# Altium PCB EVB_gate driver.PcbDoc
Units mm, origin at the board's own origin, x right, y up, seen from the top; angles counter-clockwise.
Board outline 29.97 x 33.27 mm, 2 copper layers (TOP Assembly Layer, Bottom Layer), stack 0.142 mm thick; 26 components, 19 nets, 81 pads, 0 vias.
Unrouted connection lines stored in the file: 62.
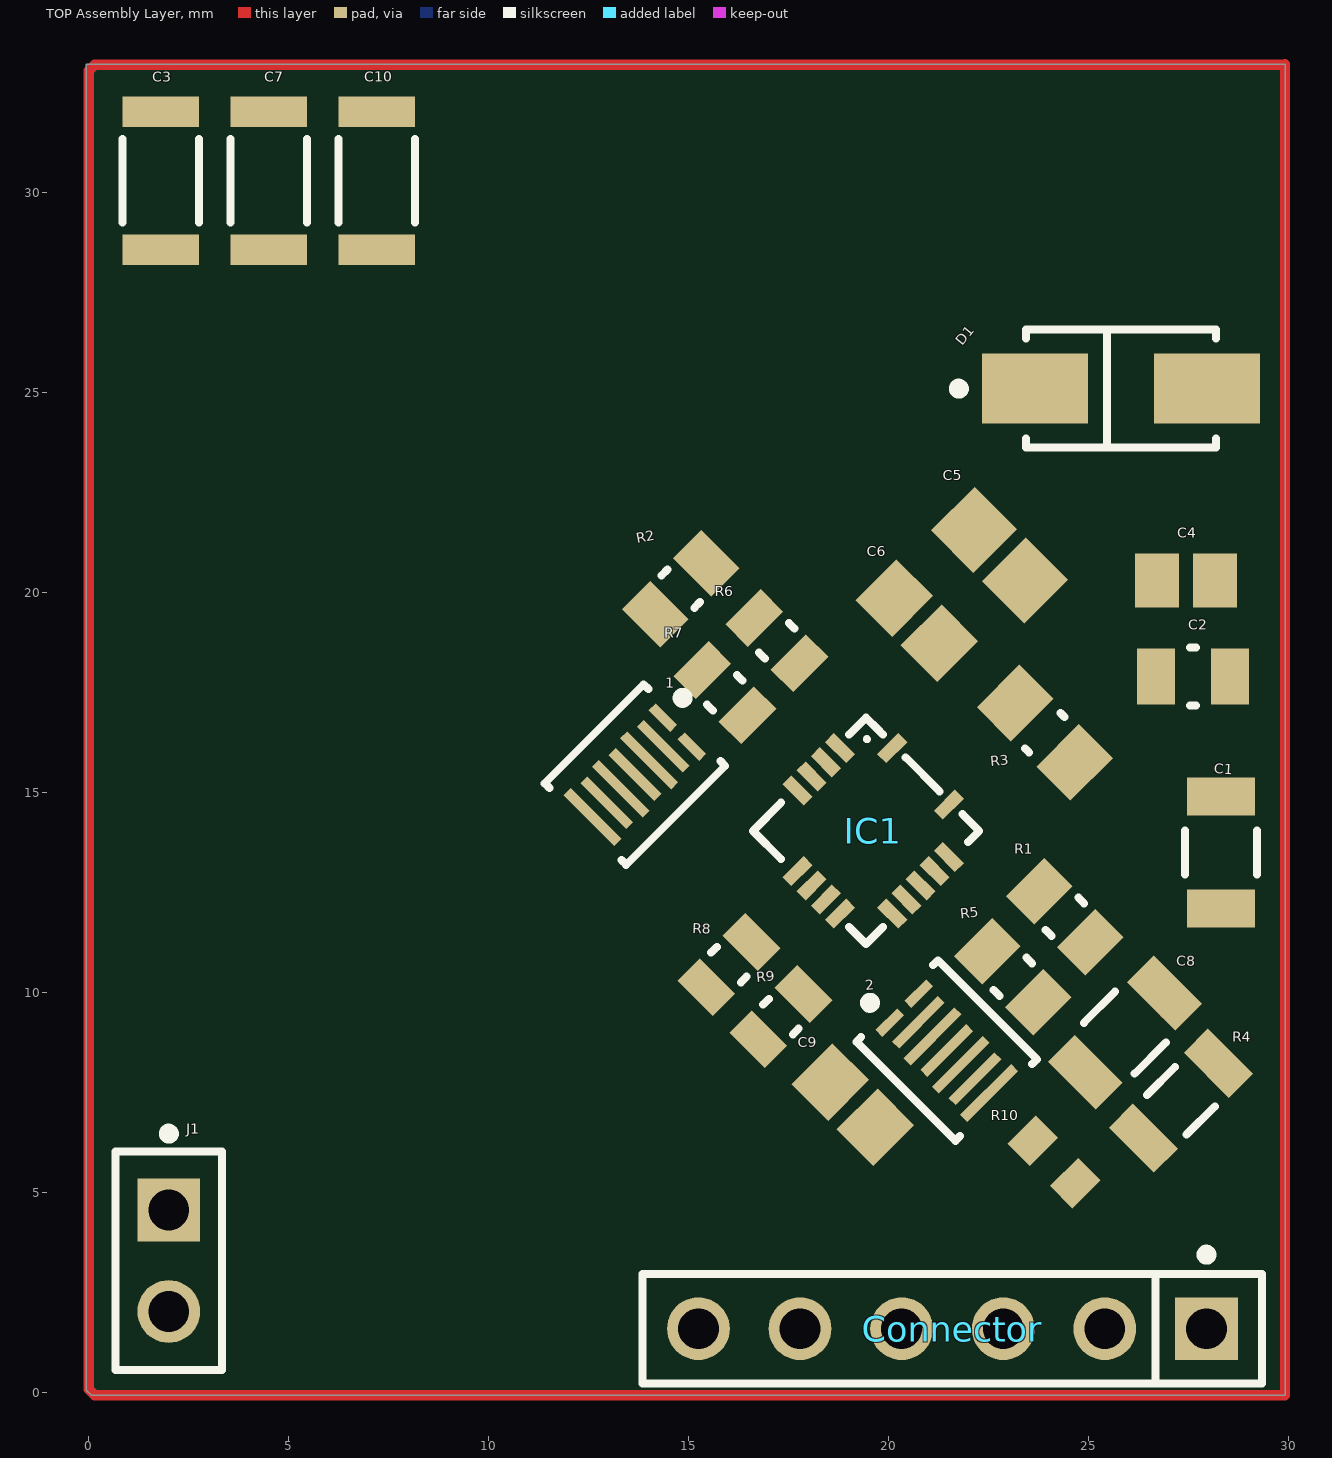
[diagram p0: TOP Assembly Layer view]
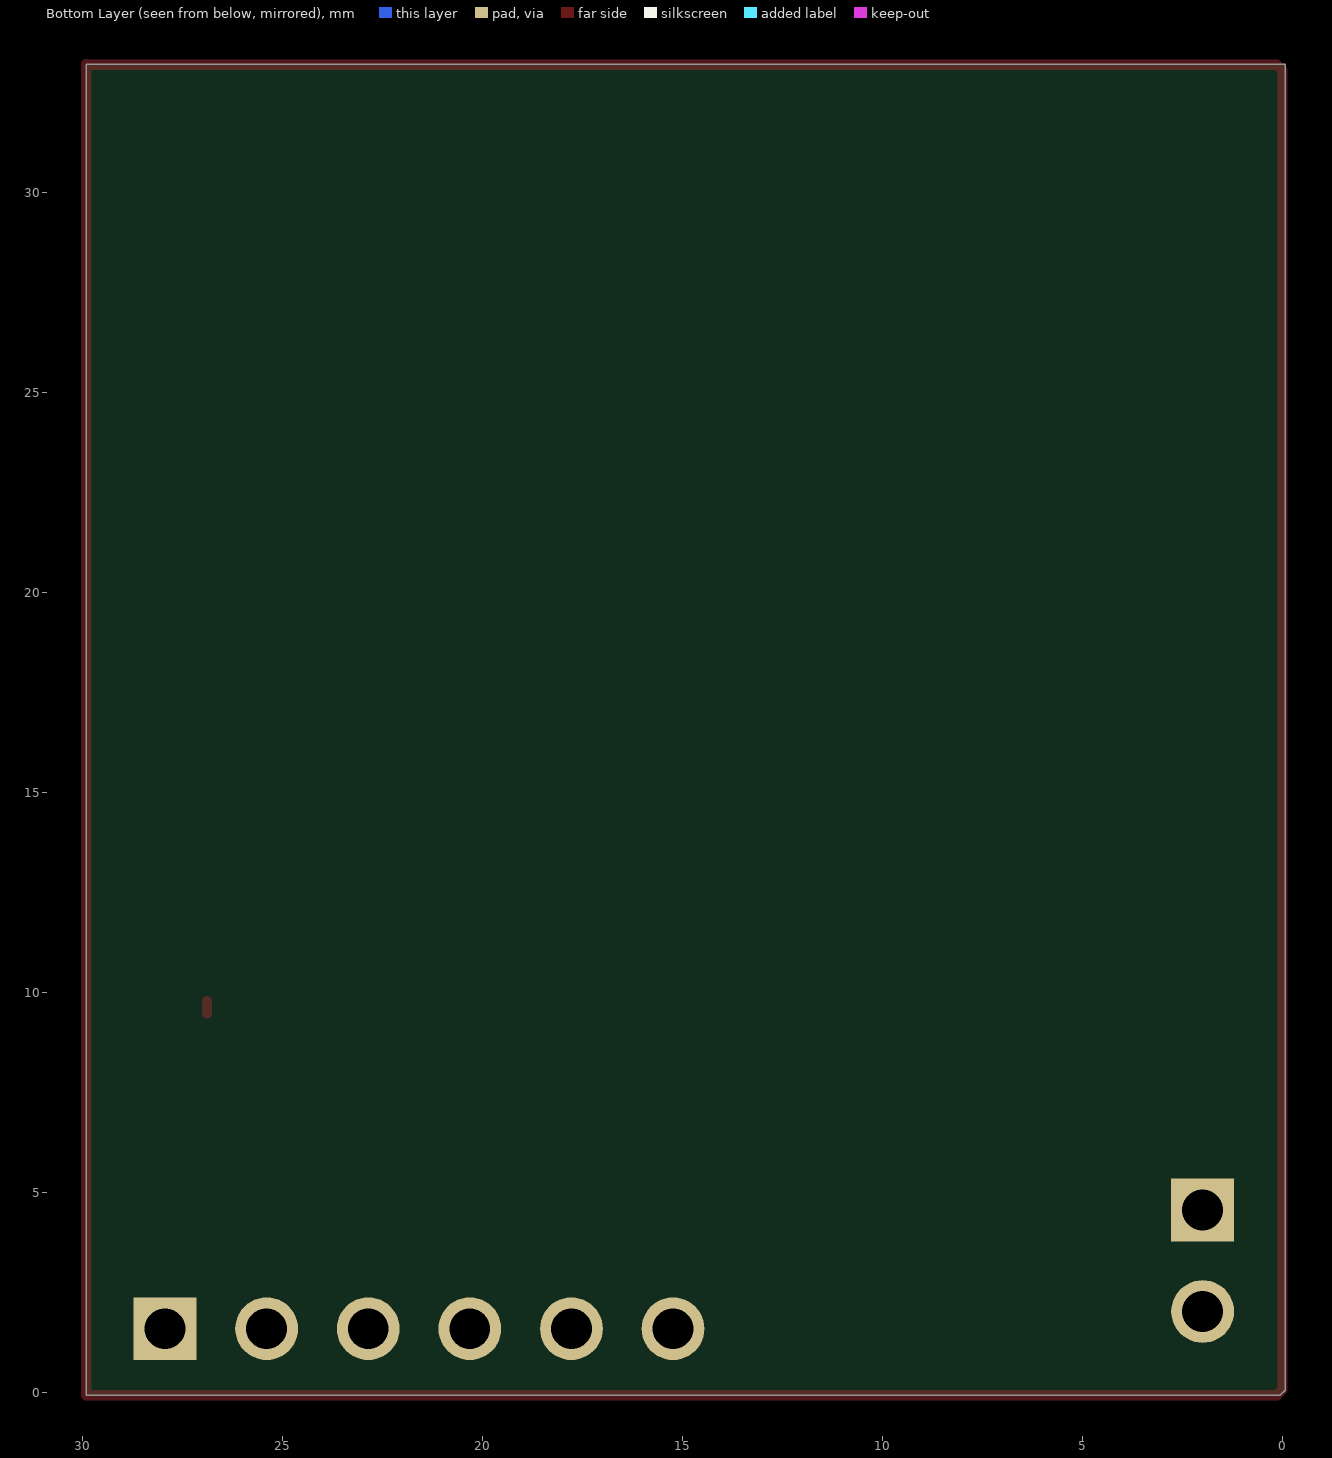
[diagram p1: Bottom Layer view, seen from below]

## Layer stack, top to bottom
Top Solder: solder mask 0.0102, Solder Resist, Dk 3.5
TOP Assembly Layer: signal copper 0.0356
Dielectric 2: prepreg 0.0711, PP-006, Dk 4.29
Bottom Layer: signal copper 0.0356
Bottom Solder: solder mask 0.0102, Solder Resist, Dk 3.5

## Board outline
29.909,-0.064 29.909,33.21 -0.064,33.21 -0.064,0.064 0.064,-0.064

## Design rules (kind name [scope] priority, off if disabled: settings)
Clearance [All] p1: gap=0.21 ignorepadtopadclearanceinfootprint=TRUE
PolygonConnect [All] p1: connectstyle=Relief reliefconductorwidth=0.254 reliefentries=4 polygonreliefangle="90 Angle" airgapwidth=0.254
RoutingVias [All] p1: holewidth=0.74 width=1.27 viastyle="Through Hole" minholewidth=0.74 minwidth=1.27 maxholewidth=0.74 maxwidth=1.27
SolderMaskExpansion [All] p1: expansion=0.102 istentingtop=FALSE
SupplyNets "Schematic Supply Nets" [InNet('GND')] p1: voltage=0.000
UnRoutedNet [All] p1: checkbadconnections=TRUE
Width [All] p1: maxlimit=0.254 minlimit=0.254 preferedwidth=0.254
29 further rules are at their usual default settings.

## Components (designator, comment, footprint, x,y, rotation, side; value= is the part's Value field where it differs from the comment)
1 "GAN3R2-100CBE" FP-WLCSP8-SOT8072-MFG 13.654,15.454 r225 top
2 "GAN3R2-100CBE" FP-WLCSP8-SOT8072-MFG 21.446,8.554 r315 top
C1 "10PF" FP-C1206C-EB-MFG 28.3,13.5 r270 top value="10 pF"
C2 "1uF" FP-CC0805-0_85-MFG 27.6,17.9 r0 top value="1 uF"
C3 "50u" FP-CGA5L-0_3-0_1-IPC_B 4.5,30.3 r270 top
C4 "100nF" CAPC2013X145X48LL20T23 27.425,20.3 r0 top
C5 "470uF" CAPC2013X140X50ML20T25 22.764,20.936 r315 top
C6 "1uF" CAPC2013X140X50NL20T25 20.7,19.3 r315 top
C7 "100uF" FP-CGA5L-0_3-0_1-IPC_B 1.8,30.3 r270 top
C8 "0.1uF" FP-C1206C-EB-MFG 25.9,9 r225 top value="0.10 μF"
C9 "1uF" CAPC2013X140X50NL20T25 19.1,7.2 r135 top
C10 "10u" FP-CGA5L-0_3-0_1-IPC_B 7.2,30.3 r270 top
Connector "" FP-22-28-4060-MFG 21.59,1.6 r180 top
D1 "ES1J" FP-403AE-MFG 25.8,25.1 r0 top value=10pF
IC1 "NCP51820" NCP51820 19.432,14.046 r315 top
J1 "TSW-102-07-F-S" FP-TSW-102-07-F-S-MFG 2,3.3 r270 top
R1 "10" RESC2013X60X35NL10T20 24.4,11.9 r315 top
R2 "10" RESC2013X60X35NL10T20 14.8,20.1 r45 top
R3 "2" FP-CRCW0805-e3-IPC_A 23.9,16.5 r315 top
R4 "60.4" RESC3116X65X40LL10T20 27.3,7.3 r225 top
R5 "10" RESC2013X60X35NL10T20 23.1,10.4 r315 top
R6 "10" RESC2013X60X35LL10T20 17.2,18.8 r315 top
R7 "2" RESC2013X60X35LL10T20 15.9,17.5 r315 top
R8 "10" RESC2013X60X35LL10T20 16,10.7 r45 top
R9 "2" RESC2013X60X35LL10T20 17.3,9.4 r45 top
R10 "0" RESC1608X55X25ML10T15 24.13,5.77 r315 top

## Footprints (in the part's own frame and the unit in brackets; to place one, negate y for a bottom-side part, rotate by r counter-clockwise, add the part's x,y. Pads: shape width x height; smd on the part's side, far side on the other; paste and mask are expansions set on the pad)
CAPC2013X140X50ML20T25 [mm] "Chip Capacitor, 2-Leads, Body 2.00x1.25mm, IPC Low Density"
  rect 1.5x1.55 smd: 1(-0.9,0) 2(0.9,0)
  body extent -1.1,-0.72 1.1,0.72, height 1.4
CAPC2013X140X50NL20T25 [mm] "Chip Capacitor, 2-Leads, Body 2.00x1.25mm, IPC Medium Density"
  rect 1.3x1.45 smd: 1(-0.8,0) 2(0.8,0)
  body extent -1.1,-0.72 1.1,0.72, height 1.4
CAPC2013X145X48LL20T23 [mm] "Chip Capacitor, 2-Leads, Body 2.00x1.25mm, IPC High Density"
  rect 1.1x1.35 smd: 1(-0.725,0) 2(0.725,0)
  body extent -1.1,-0.72 1.1,0.72, height 1.45
FP-22-28-4060-MFG [mm]
  rect 1.57x1.57 hole 1.02 paste-2539.97 mask+0: 1(-6.35,0)
  round 1.57 hole 1.02 paste-2539.97 mask+0: 2(-3.81,0) 3(-1.27,0) 4(1.27,0) 5(3.81,0) 6(6.35,0)
  silkscreen extent -7.75,-1.97 7.75,1.37, body extent -7.85,-1.47 7.85,1.47, height 0.25
FP-403AE-MFG [mm]
  rect 2.65x1.75 smd paste+0 mask+0: 1(-2.15,0) 2(2.15,0)
  silkscreen extent -4.17,-1.48 2.37,1.48, body extent -3.57,-1.58 3.57,1.58, height 0.25
FP-C1206C-EB-MFG [mm]
  rect 0.95x1.7 smd paste+0 mask+0: 1(-1.4,0) 2(1.4,0)
  silkscreen extent -0.55,-0.9 0.55,0.9, body extent -2,-1 2,1, height 0.25
FP-CC0805-0_85-MFG [mm]
  rect 0.95x1.4 smd paste+0 mask+0: 1(-0.925,0) 2(0.925,0)
  silkscreen extent -0.08,-0.72 0.08,0.72, body extent -1.6,-1.05 1.6,1.05, height 0.25
FP-CGA5L-0_3-0_1-IPC_B [mm]
  rect 0.756x1.906 smd paste+0 mask+0: 1(-1.725,0) 2(1.725,0)
  silkscreen extent -1.05,-0.95 1.05,0.95, body extent -2.35,-1.2 2.35,1.2, height 0.25
FP-CRCW0805-e3-IPC_A [mil]
  rect 47.5x59.38 smd paste+0 mask+0: 1(-41.37,0) 2(41.37,0)
  silkscreen extent -3,-25 3,25, body extent -85,-49 85,49, height 10
FP-TSW-102-07-F-S-MFG [mm]
  rect 1.57x1.57 hole 1.02 paste-2539.97 mask+0: 1(-1.27,0)
  round 1.57 hole 1.02 paste-2539.97 mask+0: 2(1.27,0)
  silkscreen extent -3.3,-1.34 2.73,1.34, body extent -2.83,-1.44 2.83,1.44, height 0.25
FP-WLCSP8-SOT8072-MFG [mm]
  rect 0.25x0.77 smd paste-1000 mask+0: 1(-1.5,-0.512) 2(-1.5,0.513)
  rect 0.25x1.62 smd paste-1000 mask+0: 3(-1,0) 5(0,0) 7(1,0)
  rect 0.25x1.8 smd paste-1000 mask+0: 4(-0.5,0) 6(0.5,0) 8(1.5,0)
  silkscreen extent -2.32,-1.44 1.75,1.44, body extent -1.75,-1.06 1.75,1.06, height 0.47
NCP51820 [mm]
  rect 0.75x0.32 smd: 1(-1.925,1) 2(-1.925,0.5) 3(-1.925,0) 4(-1.925,-0.5) 9(1.925,-1) 10(1.925,-0.5) 11(1.925,0) 12(1.925,0.5) 13(1.925,1)
  rect 0.32x0.75 smd: 5(-0.5,-1.925) 6(0,-1.925) 7(0.5,-1.925) 8(1,-1.925) 14(1,1.925) 15(-1,1.925)
  silkscreen extent -2,-2 2,2, body extent -1.84,-2.14 2.2,1.9, height 0.89
RESC1608X55X25ML10T15 [mm] "Chip Resistor, 2-Leads, Body 1.60x0.80mm, IPC Low Density"
  rect 0.8x1 smd: 1(-0.75,0) 2(0.75,0)
  body extent -0.85,-0.45 0.85,0.45, height 0.55
RESC2013X60X35LL10T20 [mm] "Chip Resistor, 2-Leads, Body 2.00x1.25mm, IPC High Density"
  rect 0.8x1.25 smd: 1(-0.8,0) 2(0.8,0)
  silkscreen extent -0.1,-0.53 0.1,0.53, body extent -1.05,-0.68 1.05,0.68, height 0.6
RESC2013X60X35NL10T20 [mm] "Chip Resistor, 2-Leads, Body 2.1x1.35mm, IPC Medium Density"
  rect 1x1.35 smd: 1(-0.9,0) 2(0.9,0)
  silkscreen extent -0.1,-0.58 0.1,0.58, body extent -1.05,-0.68 1.05,0.67, height 0.6
RESC3116X65X40LL10T20 [mm] "Chip Resistor, 2-Leads, Body 3.10x1.60mm, IPC High Density"
  rect 0.85x1.6 smd: 1(-1.325,0) 2(1.325,0)
  silkscreen extent -0.5,-0.7 0.5,0.7, body extent -1.6,-0.85 1.6,0.85, height 0.65

## Part data
1 2: library part GAN3R2-100CBE_1, "GAN3R2-100CBE                                                                                                                                                                                                                                                     100 V, 3.2 mOhm Gallium Nitride (GaN) FET in a 3.5 mm x 2.13 mm Wafer Level Chip", Continuous Drain Current (ID)=60A, Drain to Source Breakdown Voltage=100V, Drain to Source Resistance=2.4mΩ, Gate to Source Voltage (Vgs)=-4V, Max Junction Temperature (Tj)=150°C, Min Operating Temperature=-40°C, Power Dissipation=394W, Drain to Source Voltage (Vdss)=100V, Height=464µm, Max Operating Temperature=150°C, MPN=GAN3R2-100CBE, NexarPartId=136220986, Number of Channels=1
C1: library part CMP-1037-00647-2, "CAP CER 10PF 50V C0G/NP0 1206", Capacitance="10 pF", Manufacturer=KEMET, Manufacturer Part Number=C1206C100J5GACTU, Package=C1206C-EB, Temperature="-55°C to +150°C", Temperature Characteristic=C0G, Temperature Coefficient=15%, Temperature Range High=+150°C, Temperature Range Low=-55°C, Tolerance=0.05, Voltage Rating="50 V", Automotive=Yes, Automotive Grade="Grade 0", Category=Cap, ComponentLink2Description=Datasheet, ComponentLink2URL=https://content.kemet.com/datasheets/KEM_C1007_X8R_ULTRA_150C_SMD.pdf, Device Class L1="Passive Components", Device Class L2=Capacitors, Device Class L3="Ceramic Capacitors", Digikey Description="CAP CER 10PF 50V C0G/NP0 1206", Height=0.88mm, Ipc Land Pattern Name=CAPC320160X78, Lead Free=Yes, Material=Ceramic, Mouser Description="Multilayer Ceramic Capacitors MLCC - SMD/SMT 50volts 10pF C0G 5%", Octopart=https://octopart.com/c1206c100j5gactu-kemet-87062, RoHS=TRUE
C2: library part CMP-03422-000001-1, "CAP CER 1UF 16V X7R 0805", Capacitance="1 uF", Manufacturer=Yageo, Manufacturer Part Number=CC0805KKX7R7BB105, Package=CC0805-0.85, Temperature="-30°C to +85°C", Temperature Characteristic=X7R, Temperature Range High=+85°C, Temperature Range Low=-30°C, Tolerance=0.1, Voltage Rating="16 V", Automotive=No, Category=Cap, ComponentLink2Description=Datasheet, ComponentLink2URL=http://www.yageo.com/documents/recent/UPY-GPHC_Y5V_6.3V-to-50V_8.pdf, Device Class L1="Passive Components", Device Class L2=Capacitors, Device Class L3="Ceramic Capacitors", Digikey Description="CAP CER 1UF 16V X7R 0805", Footprint Url=http://www.yageo.com/exep/pages/download/literatures/UPY-C_GEN_24.pdf, Height=0.95mm, Ipc Land Pattern Name=CAPC200125X85, Lead Free=Yes, Material=Ceramic, Mouser Description="Multilayer Ceramic Capacitors MLCC - SMD/SMT 1.0uF 16V X7R 10%", Octopart=https://octopart.com/cc0805kkx7r7bb105-yageo-8376555, RoHS=TRUE
C3 C7 C10: library part CMP-08246-001673-1, "Cap Ceramic 100nF 450V X7T 10% Pad SMD 1206 +125°C Automotive T/R", Capacitance=100nF, Case Code (Imperial)=1206, Case Code (Metric)=3216, Dielectric=X7T, Max Operating Temperature=125°C, Min Operating Temperature=-55°C, Package Quantity=1, Ratings=AEC-Q200, Tolerance=10%, Voltage Rating=450V, Case/Package=1206, Depth=1.6mm, Features="Soft Termination", Height=1.6mm, Lead Free="Lead Free", Length=3.2mm, Mount="Surface Mount", Packaging="Tape and Reel", REACH SVHC="No SVHC", Termination=SMD/SMT, Thickness=0.075inch, Voltage Rating (DC)=450V, Weight=0.000571oz, Width=0.063inch
C4: library part CMP-2007-03166-1, Manufacturer=Vitramon, Part Number=VJ0805Y104JXXAT
C5: library part CMP-2007-04613-1, Manufacturer="AVX Interconnect / Elco", Part Number=08053D474KAT2A
C6 C9: library part CMP-1036-04753-2, Manufacturer=Kemet, Part Number=C0805C105K3PACTU
C8: library part CMP-03020-001014-1, "CAP CER 0.1UF 25V 10% X7R 1206", Capacitance="0.10 μF", Manufacturer=KEMET, Manufacturer Part Number=C1206C104K3RACTU, Package=C1206C-EB, Temperature="-55°C to +150°C", Temperature Characteristic=X7R, Temperature Coefficient=15%, Temperature Range High=+150°C, Temperature Range Low=-55°C, Tolerance=0.1, Voltage Rating="25 V", Automotive=Yes, Automotive Grade="Grade 0", Category=Cap, ComponentLink2Description=Datasheet, ComponentLink2URL=https://content.kemet.com/datasheets/KEM_C1007_X8R_ULTRA_150C_SMD.pdf, Device Class L1="Passive Components", Device Class L2=Capacitors, Device Class L3="Ceramic Capacitors", Digikey Description="CAP CER 0.1UF 25V 10% X7R 1206", Height=0.88mm, Ipc Land Pattern Name=CAPC320160X78, Lead Free=Yes, Material=Ceramic, Mouser Description="CAP CER 0.1UF 25V X7R 1206", Octopart=https://octopart.com/c1206c104k3ractu-kemet-9144317, RoHS=TRUE
Connector: library part CMP-04776-000763-1, "CONN HEADER VERT 6POS 2.54MM", Color=Black, Contact Resistance=20mR, Current Rating=4A, Max Operating Temperature=75°C, Max Voltage Rating (AC)=250V, Max Voltage Rating (DC)=250.25kV, Min Operating Temperature=0°C, MPN=22-28-4060, Package Quantity=1, Connector Type="Male Pin", Contact Material=Brass, Contact Mating Length=0.24inch, Contact Plating=Tin, Contact Type="Male Pin", Depth=2.49mm, Gender=Male, Housing Color=Black, Housing Material=Thermoplastic, Length=15.24mm, Mount="Through Hole", Number Of Contacts=6, Number of Positions=6, Number Of Rows=1, Orientation=Straight, Packaging=Bulk, Pitch=2.54mm, RoHS Compliant=Yes, Series="KK® 42375", Termination=Solder, Voltage Rating=250V
D1: library part CMP-07163-000025-1, "DIODE GEN PURP 400V 1A SMA", Capacitance=10pF, Forward Current=1A, Manufacturer="ON Semiconductor", Manufacturer Part Number=ES1G, Max Junction Temp=+150°C, Max Repetitive Reverse Voltage=400V, Max Surge Forward Current=30A, Package=403AE, Peak Reverse Current=5uA, Temperature="to +150°C", Automotive=No, Category=Diode, ComponentLink2Description=Datasheet, ComponentLink2URL=https://www.onsemi.com/pub/Collateral/ES1J-D.PDF, Device Class L1="Discrete Semiconductors", Device Class L2=Diodes, Device Class L3="Rectifier Diodes", Digikey Description="DIODE GEN PURP 400V 1A SMA", Footprint Url=https://www.onsemi.com/pub/Collateral/403AE.PDF, Height=2.5mm, Lead Free=Yes, Mouser Description="Rectifiers 1.0 A Ultra Fast Recovery Rect", MPN=ES1J, Octopart=https://octopart.com/es1g-on+semiconductor-84324858, RoHS=TRUE, Standoff Height=0.05mm, Temperature Range High=+150°C
IC1: "Integrated Circuit", Manufacturer_Name=onsemi, Mouser Part Number=N/A, Datasheet Link=https://www.onsemi.com/download/data-sheet/pdf/ncp51820-d.pdf, Height=0.9mm, Manufacturer_Part_Number=NCP51820, Mouser Price/Stock=https://www.mouser.co.uk/ProductDetail/onsemi/NCP51820?qs=vEM7xhTegWhaPMdkL3AwCA%3D%3D, MPN=NCP51820
J1: library part CMP-02766-001458-1, "CONN HEADER VERT 2POS 2.54MM", Color=Black, Flammability Rating="UL94 V-0", Max Current Rating=7.6A, Max Operating Temperature=125°C, Max Voltage Rating (AC)=550V, Min Operating Temperature=-55°C, Package Quantity=1, Connector Type=Header, Contact Finish - Mating=GOLD, Contact Material=Bronze, Contact Mating Length=0.23inch, Contact Plating=Gold, Contact Shape=Square, Contact Type="Male Pin", Depth=2.54mm, Fastening Type=Pull, Gender=Male, Housing Color=Black, Housing Material=Polyester, Insulation Color=Black, Insulation Material=PBT, Length=5.08mm, Mount="Through Hole", Number Of Contacts=2, Number of Positions=2, Number Of Rows=1, Orientation=Straight, Packaging=Bulk, Pitch=2.54mm, Radiation Hardening=No, REACH SVHC="No SVHC", RoHS Compliant=Yes, Series=TSW, Termination=Solder
R1 R2 R5: library part CMP-1659-00013-4, "Chip Resistor, 10 KOhm, +/- 1%, 0.125 W, -55 to 155 degC, 0805 (2012 Metric), RoHS, Tape and Reel", Manufacturer=Yageo, Max Operating Temperature="155 degC", Min Operating Temperature="-55 degC", Package Quantity=5000, Voltage Rating="150 V", ComponentLink1Description="Manufacturer URL", ComponentLink1URL=http://www.yageo.com/, ComponentLink2Description=Datasheet, ComponentLink2URL=http://www.yageo.com/documents/recent/PYu-RC_Group_51_RoHS_L_04.pdf, DatasheetVersion="Rev. 4, 02/2016", Height="0.5 mm", Length="2 mm", Mount="Surface Mount", Mounting Technology="Surface Mount", PackageDescription="2-Pin Surface Mounted Device, Body 2 x 1.25 mm", PackageReference=0805, Packaging="Tape and Reel", Pins=2, REACH SVHC="No SVHC", RoHSCompliant=true
R3: library part CMP-02407-008824-1, "RES Thick Film, 2Ω, 1%, 0.125W, 100ppm/°C, 0805", Case/Package=0805, Max Operating Temperature=155°C, Max Power Dissipation=125mW, Min Operating Temperature=-55°C, Package Quantity=20000, Resistance=2R, Temperature Coefficient=100ppm/°C, Tolerance=1%, Composition="Thick Film", Features="Automotive AEC-Q200", Height=0.02inch, Lead Free="Lead Free", Length=0.079inch, Number of Terminations=2, Packaging="Tape and Reel", Power Rating=125mW, Width=0.049inch
R4: library part CMP-2003-03498-1, Manufacturer=Yageo, Part Number=RC1206FR-1360R4L
R6 R8: library part CMP-2001-04531-1, Manufacturer=Yageo, Part Number=RC0805FR-1310RL
R7 R9: library part CMP-1013-00009-2, Manufacturer=Yageo, Part Number=RC0805JR-072RL
R10: library part CMP-2100-03667-1, "Chip Resistor, 0 Ohm, +/- 5%, 0.1 W, -55 to 155 degC, 0603 (1608 Metric), RoHS, Tape and Reel", Case Code (Imperial)=0603, Case Code (Metric)=1608, Manufacturer=Yageo, Max Operating Temperature=155degC, Min Operating Temperature=-55degC, MPN=RC0603JR−070RL, Package Description="2-Pin Surface Mount Device, Body 1.6 x 0.8 mm", Package Quantity=5000, Power Rating=100mW, Resistance=0mOhm, Temperature Coefficient=200ppm/degreesC, Tolerance=5%, Voltage Rating=50V, Case/Package=0603, Composition=ThickFilm, Contact Plating=Tin, Datasheet URL=http://www.yageo.com/NewPortal/yageodocoutput?fileName=/pdf/R-Chip/PYu-RC_Group_51_RoHS_L_5.pdf, Datasheet Version="Rev. 5, 10/2016", Depth=0.8mm, Height=0.45mm, Lead Free=LeadFree, Length=1.6mm, Manufacturer URL=http://www.yageo.com/, Military Standard=Not, Number of Pins=2, Package Reference=0603, Packaging=TapeandReel, Radiation Hardening=No, REACH SVHC=NoSVHC, RoHSCompliant=true, Termination=SMD/SMT, Voltage Rating (DC)=50V, Width=0.8mm

## Nets (pads, with @x,y where several pads share a name; then routed paths per layer and width w, separated by ;. In a path a pad name is that pad's centre, name@x,y a point inside that pad or via, vN(x,y) a via of type N, cw(c..) or ccw(c..) an arc to the next point about the centre after c; other vN are vias at no path point)
GND: C1.2 C2.2 C4.2 C8.2 Connector.3 Connector.6 IC1.10 R4.2 R10.2
Net1_1: 1.1 R2.2 R6.1 R7.1
Net1_2: 1.2 1.4 1.6 1.8 2.3 2.5 2.7 C5.1 C6.1 IC1.4 R2.1
Net1_3: 1.3 1.5 1.7 C3.1 C7.1 C10.1 J1.1
Net2_1: 2.1 R5.2 R8.1 R9.1
Net2_2: 2.2 2.4 2.6 2.8 C3.2 C7.2 C9.1 C10.2 IC1.8 J1.2 R5.1 R10.1
NetC1_1: C1.1 Connector.1 IC1.13 R1.1
NetC2_1: C2.1 C4.1 Connector.2 IC1.14 R1.2 R3.2
NetC5_2: C5.2 D1.1 IC1.15
NetC6_2: C6.2 IC1.1
NetC8_1: C8.1 IC1.9 R4.1 | length 0.3
  TOP Assembly Layer w0.254: C8.1@26.89,9.484 C8.1@26.89,9.79
NetC9_2: C9.2 IC1.5
NetConnector_4: Connector.4 IC1.12
NetConnector_5: Connector.5 IC1.11
NetD1_2: D1.2 R3.1
NetIC1_2: IC1.2 R6.2
NetIC1_3: IC1.3 R7.2
NetIC1_6: IC1.6 R8.2
NetIC1_7: IC1.7 R9.2
copper on no net: | length 126.2
  TOP Assembly Layer w0.254: 29.9,33.2 0.149,33.2 0,33.051 0,0.085 0.149,-0.064 29.909,-0.064 29.909,33.21

## Polygon pours and split planes (outlines as drawn)
no net on Top Designator (solid): 5.75,17.75